# Altium PCB keeb1_V2.PcbDoc
Units mm, origin at the board's own origin, x right, y up, seen from the top; angles counter-clockwise.
Board outline 66.75 x 50.35 mm, 4 copper layers (Top Layer, INT_1, INT_2, Bottom Layer), stack 0.605 mm thick; 40 components, 40 nets, 160 pads, 39 vias.
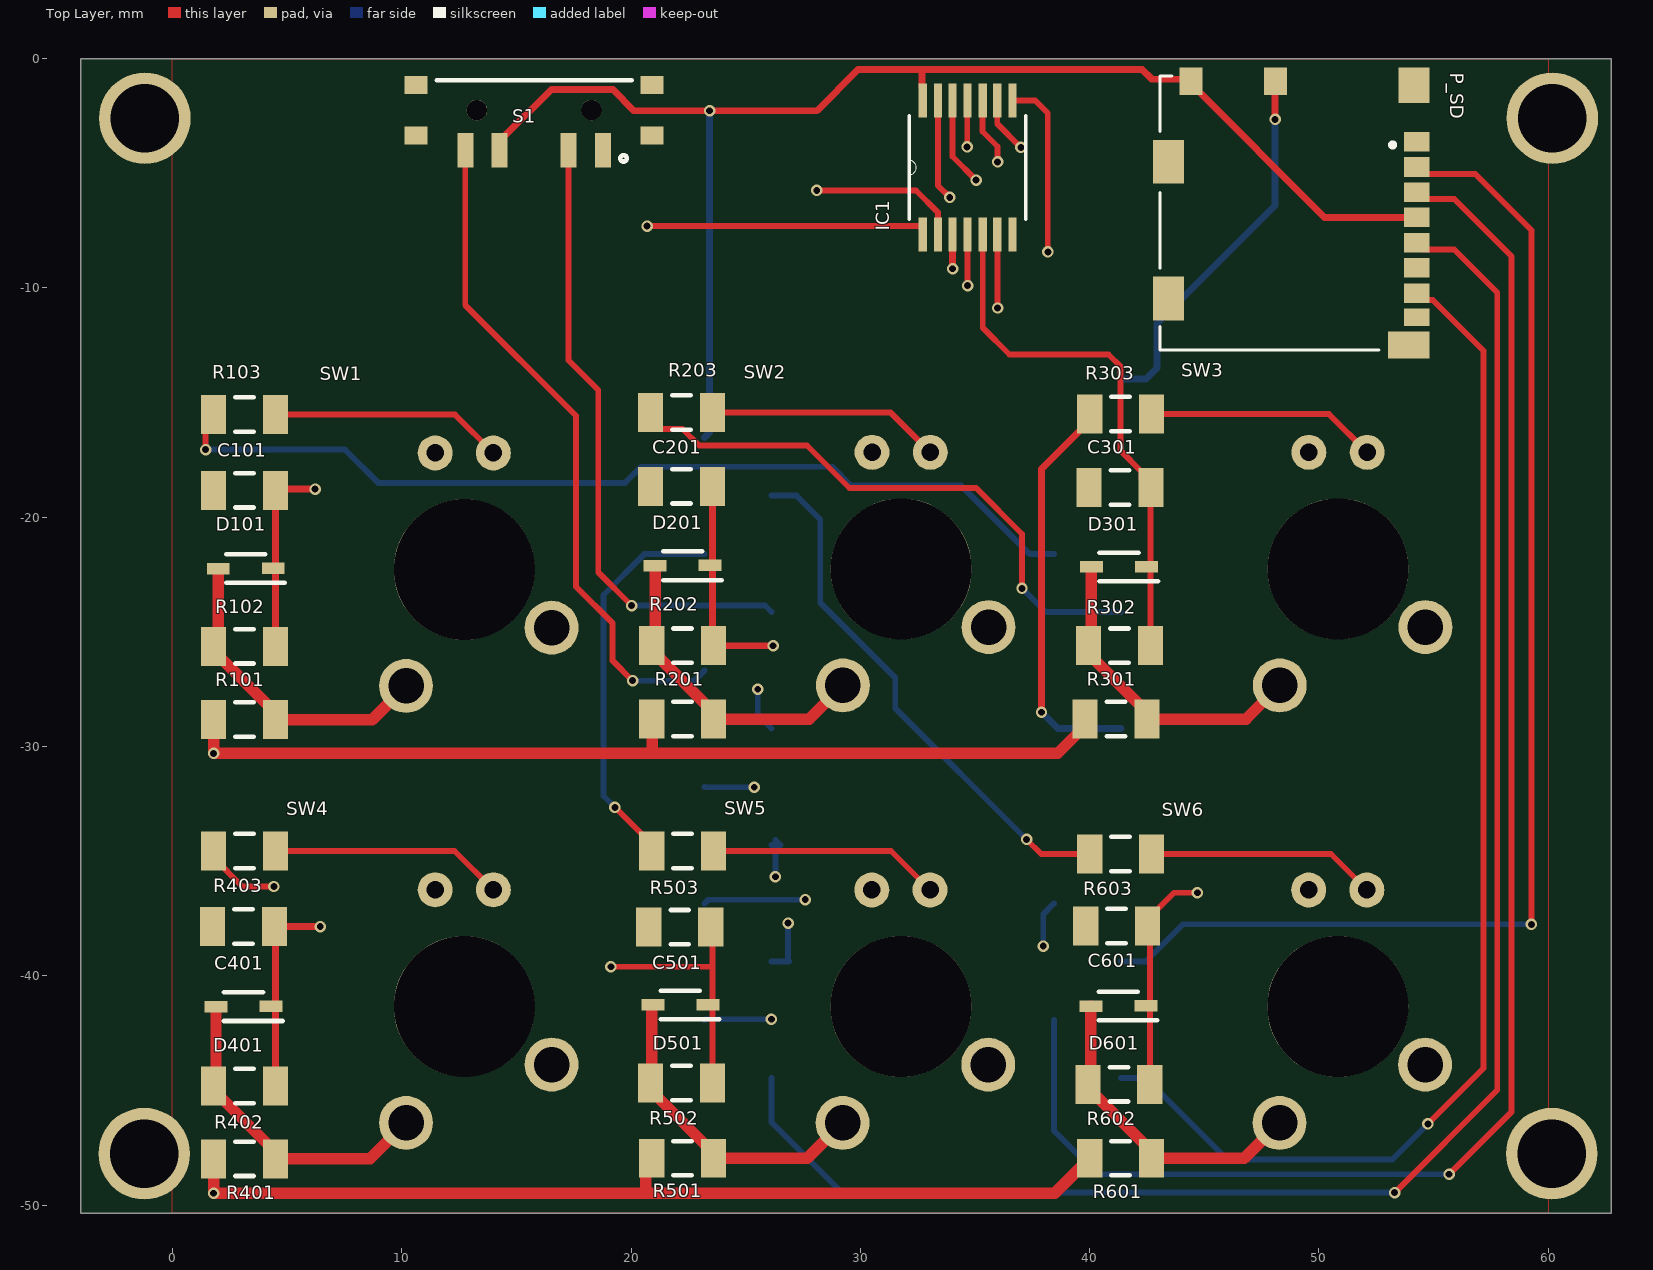
[diagram p0: Top Layer view]
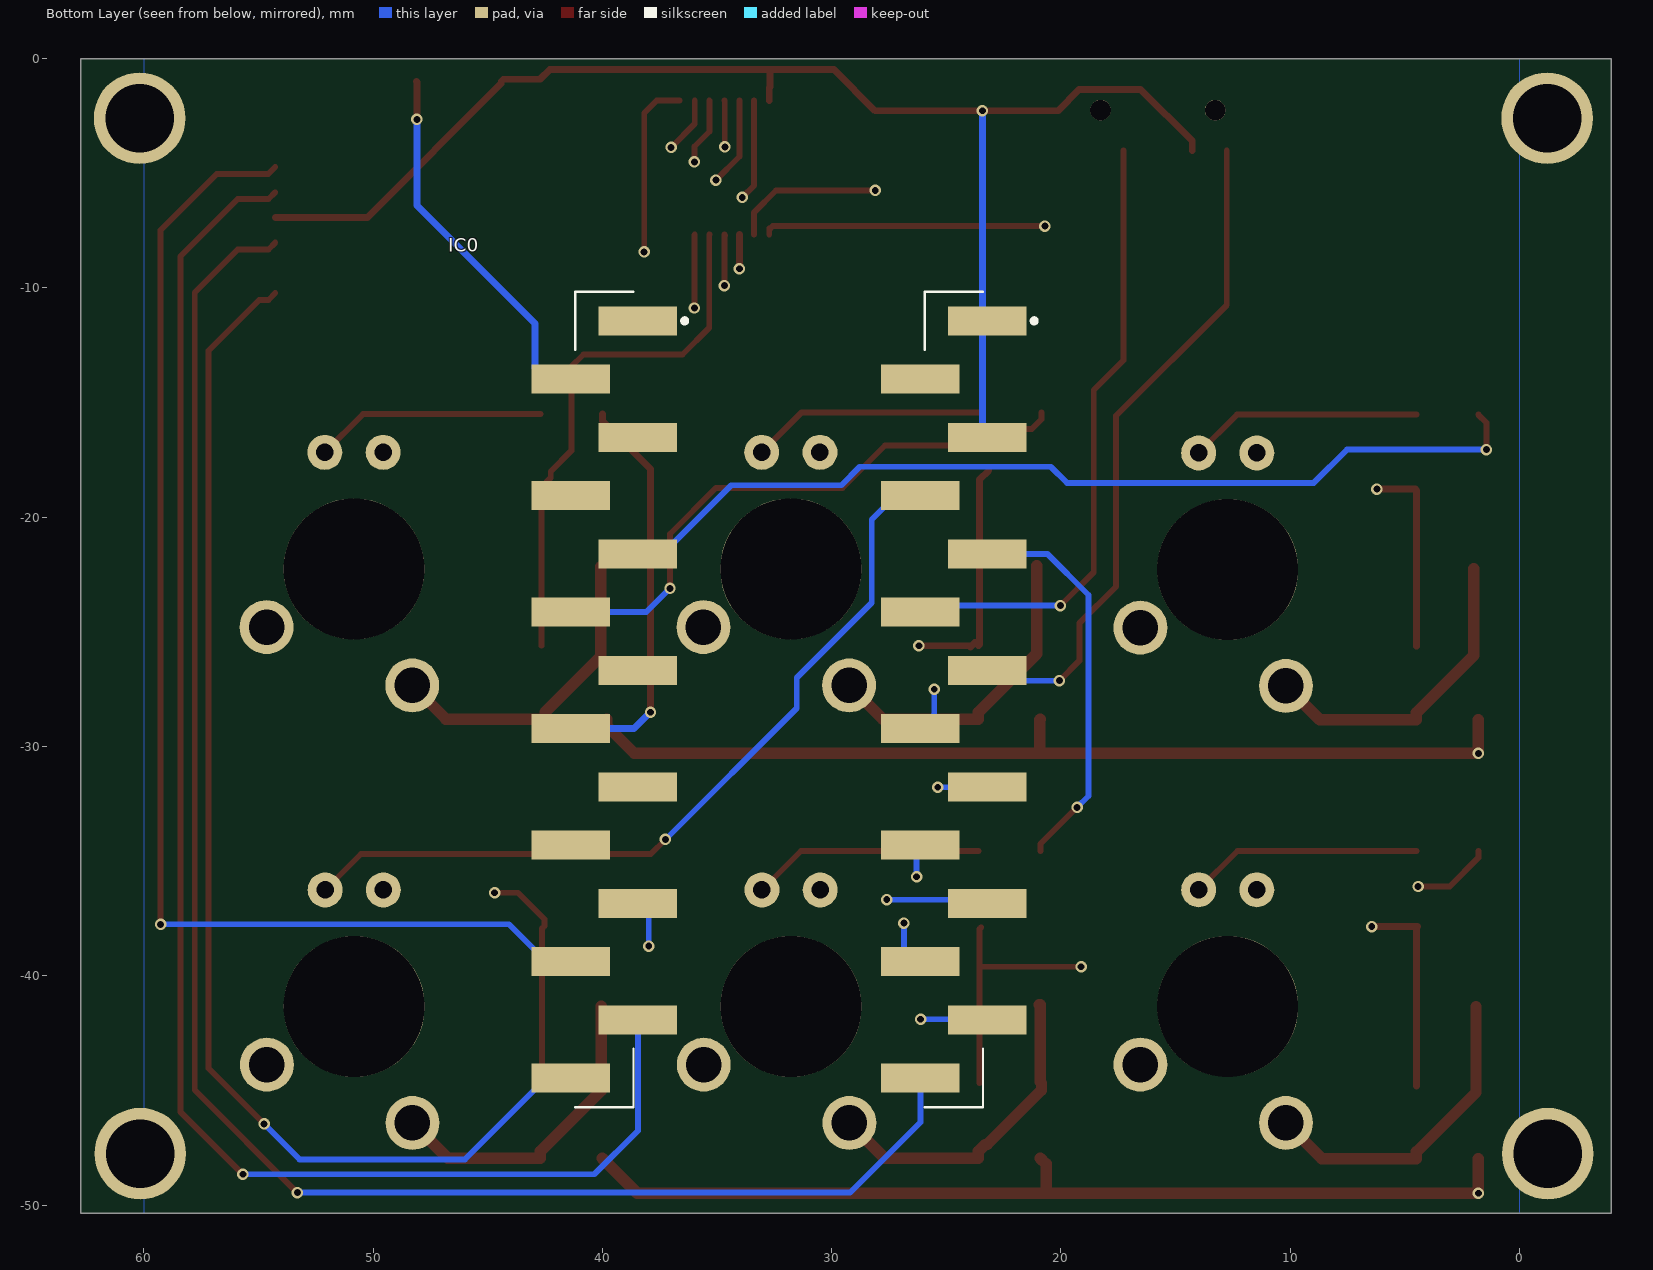
[diagram p1: Bottom Layer view, seen from below]
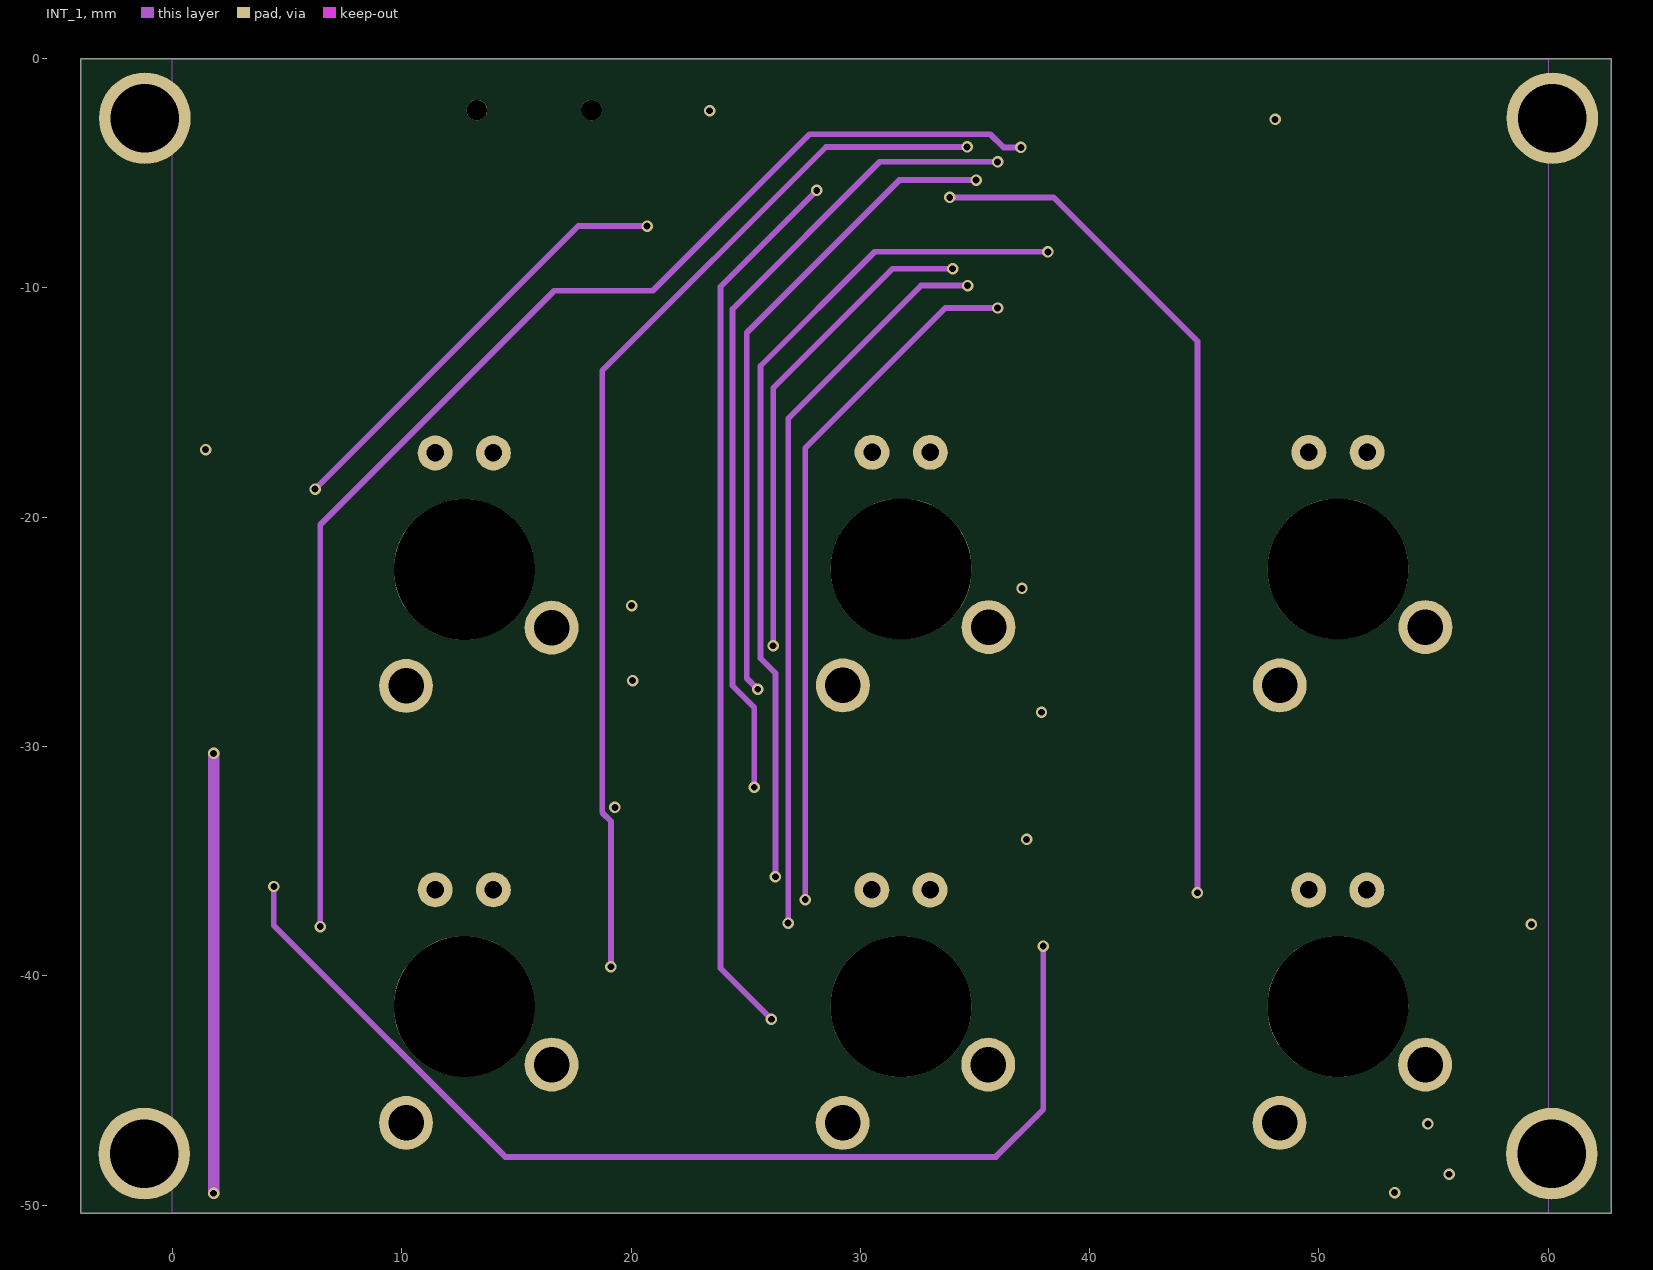
[diagram p2: INT_1]
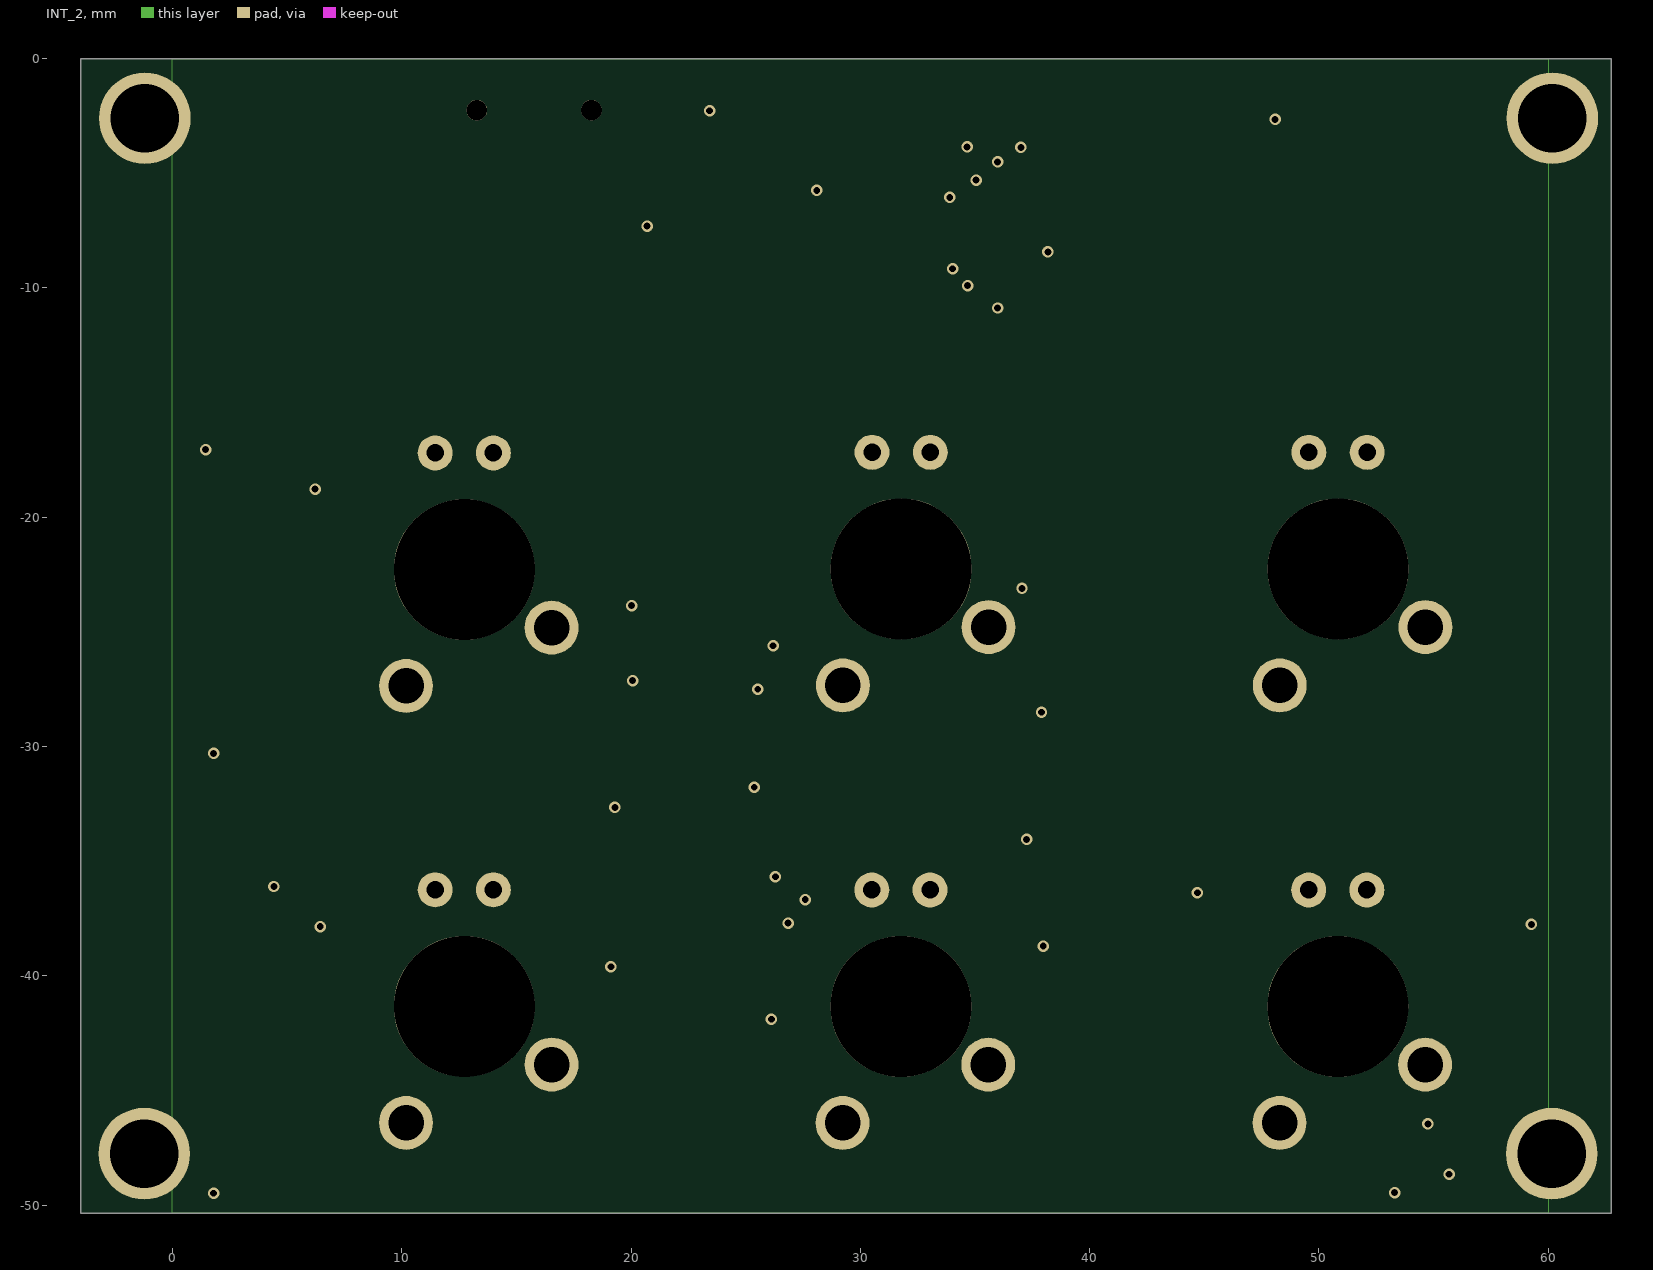
[diagram p3: INT_2]

## Layer stack, top to bottom
Top Solder: solder mask 0.0102, Solder Resist, Dk 3.5
Top Layer: signal copper 0.0356
Dielectric 2: prepreg 0.0711, PP-006, Dk 4.1
INT_1: signal copper 0.0356
Dielectric 1: dielectric 0.32, FR-4, Dk 4.8
INT_2: signal copper 0.0356
Dielectric 3: prepreg 0.0711, PP-006, Dk 4.1
Bottom Layer: signal copper 0.0356
Bottom Solder: solder mask 0.0102, Solder Resist, Dk 3.5

## Board outline
-4,-50.35 -4,0 62.75,0 62.75,-50.35

## Design rules (kind name [scope] priority, off if disabled: settings)
Clearance [All] p1: gap=0.178 ignorepadtopadclearanceinfootprint=TRUE
ComponentClearance ComponentClearance_1 [InComponent('IC0') or InComponent('P_SD')] p1: gap=0 collisioncheckmode=3 verticalgap=0 showdistances=FALSE
ComponentClearance [All] p2: gap=0.254 collisioncheckmode=3 verticalgap=0.254 showdistances=FALSE
HoleSize [All] p1: absolutevalues=TRUE maxlimit=10 minlimit=0.025 maxpercent=80.000 minpercent=20.000
MinimumSolderMaskSliver [All] p1: minsoldermaskwidth=0.032
PolygonConnect [All] p1: connectstyle=Relief reliefconductorwidth=0.254 reliefentries=4 polygonreliefangle="90 Angle" airgapwidth=0.254
RoutingVias [All] p1: holewidth=0.711 width=1.27 viastyle="Through Hole" minholewidth=0.2 minwidth=0.3 maxholewidth=2 maxwidth=5
SilkToSilkClearance [All] p1: silktosilkclearance=0.025
SilkToSolderMaskClearance [IsPad] p1: minsilkscreentomaskgap=0.025 clearancetoexposedcopper=TRUE
SolderMaskExpansion [All] p1: expansion=0.102
Width [All] p1: maxlimit=0.8 minlimit=0.254 preferedwidth=0.36
25 further rules are at their usual default settings.

## Components (designator, comment, footprint, x,y, rotation, side; value= is the part's Value field where it differs from the comment)
C101 "Cap" C1206 3.15,-18.825 r0 top value=0.68uF
C201 "Cap" C1206 22.2,-18.65 r0 top value=0.68uF
C301 "Cap" C1206 41.325,-18.7 r0 top value=0.68uF
C401 "Cap" C1206 3.1,-37.85 r0 top value=0.68uF
C501 "Cap" C1206 22.125,-37.875 r0 top value=0.68uF
C601 "Cap" C1206 41.175,-37.825 r0 top value=0.68uF
D101 "Diode" MMDL6050T1G 3.15,-22.275 r0 top
D201 "Diode" MMDL6050T1G 22.2,-22.15 r0 top
D301 "Diode" MMDL6050T1G 41.225,-22.2 r0 top
D401 "Diode" MMDL6050T1G 3.05,-41.375 r0 top
D501 "Diode" MMDL6050T1G 22.1,-41.3 r0 top
D601 "Diode" MMDL6050T1G 41.2,-41.35 r0 top
IC0 "Teensy_LC_MAIN_PINS" Teensy_LC_SMD_MAIN 38.45,-11.435 r180 bottom
IC1 "SN74AHC14Pw" TSSOP-14 34.675,-4.75 r90 top
P_SD "104031-0811" SDCARD 44.761,-12.731 r90 top
R101 "Res1" C1206 3.15,-28.825 r180 top value=10k
R102 "Res1" C1206 3.15,-25.625 r180 top value=1K
R103 "Res1" C1206 3.15,-15.525 r0 top value=750
R201 "Res1" C1206 22.25,-28.8 r180 top value=10k
R202 "Res1" C1206 22.25,-25.6 r180 top value=1K
R203 "Res1" C1206 22.2,-15.425 r0 top value=750
R301 "Res1" C1206 41.15,-28.8 r180 top value=10k
R302 "Res1" C1206 41.3,-25.6 r180 top value=1K
R303 "Res1" C1206 41.35,-15.5 r0 top value=750
R401 "Res1" C1206 3.15,-47.975 r180 top value=10k
R402 "Res1" C1206 3.15,-44.8 r180 top value=1K
R403 "Res1" C1206 3.15,-34.55 r0 top value=750
R501 "Res1" C1206 22.25,-47.95 r180 top value=10k
R502 "Res1" C1206 22.2,-44.675 r180 top value=1K
R503 "Res1" C1206 22.25,-34.55 r0 top value=750
R601 "Res1" C1206 41.35,-47.95 r180 top value=10k
R602 "Res1" C1206 41.275,-44.725 r180 top value=1K
R603 "Res1" C1206 41.35,-34.686 r0 top value=750
S1 "PCM13SMTR" PCM-13SMTR 19.673,-4.36 r180 top
SW1 "MX1A-Switch" MX1A-SWITCH 12.741,-22.245 r180 top
SW2 "MX1A-Switch" MX1A-SWITCH 31.791,-22.22 r180 top
SW3 "MX1A-Switch" MX1A-SWITCH 50.841,-22.22 r180 top
SW4 "MX1A-Switch" MX1A-SWITCH 12.741,-41.295 r180 top
SW5 "MX1A-Switch" MX1A-SWITCH 31.78,-41.3 r180 top
SW6 "MX1A-Switch" MX1A-SWITCH 50.83,-41.3 r180 top

## Footprints (in the part's own frame and the unit in brackets; to place one, negate y for a bottom-side part, rotate by r counter-clockwise, add the part's x,y. Pads: shape width x height; smd on the part's side, far side on the other; paste and mask are expansions set on the pad)
C1206 [mm] "Chip Capacitor, Body 3.2x1.6mm, IPC High Density"
  rect 1.1x1.7 smd: 1(-1.35,0) 2(1.35,0)
  silkscreen extent -0.4,-0.75 0.4,0.75, body extent -1.7,-0.9 1.7,0.9, height 1.3
MMDL6050T1G [mm]
  rect 1x0.5 smd: 1(-1.147,0.036) 2(1.25,0.05)
  silkscreen extent -0.8,-0.59 1.75,0.66
MX1A-SWITCH [mm]
  round 2.35 hole 1.55: 1(-3.799,2.57) 2(2.551,5.11)
  round 6.15 hole 6.15: 5(0.011,0.03)
  round 1.524 hole 0.762: 6(-1.259,-5.05) 7(1.281,-5.05)
  body extent -7.72,-7.85 7.88,7.75, height 15.21
PCM-13SMTR [mm] "SP3T"
  rect 0.7x1.5 smd: 1(0.898,-0.36) 2(2.398,-0.36) 3(5.398,-0.36) 4(6.898,-0.36)
  round 0.9 hole 0.9 unplated: None(1.398,-2.11) None(6.398,-2.11)
  rect 1x0.8 smd: P$1(-1.252,-1.01) P$2(-1.252,-3.21) P$3(9.048,-1.01) P$4(9.048,-3.21)
  silkscreen extent -0.35,-3.41 8.15,0.13, body extent -0.35,-3.4 8.18,-0.8, height 1.4
SDCARD [mm]
  rect 0.85x1.1 smd: 1(9.106,-9.499) 3(6.906,-9.499) 4(5.806,-9.499) 5(4.706,-9.499) 6(3.606,-9.499) 7(2.506,-9.499)
  rect 0.875x1.1 smd: 2(8.006,-9.499)
  rect 0.75x1.1 smd: 8(1.456,-9.499)
  rect 1.2x1 smd: 9(11.741,-3.349) 10(11.741,0.351)
  rect 1.55x1.35 smd: G1(11.566,-9.374)
  rect 1.17x1.8 smd: G2(0.246,-9.149)
  rect 1.9x1.35 smd: G3(2.271,1.326) G4(8.241,1.326)
  silkscreen extent 0.03,-8.55 11.98,1.7, body extent -1.45,-13.18 12.65,2.02, height 1.86
Teensy_LC_SMD_MAIN [mm]
  rect 3.43x1.27 smd: 0(-2.92,-2.54) 1(0,-5.08) 2(-2.92,-7.62) 3(0,-10.16) 3.3V(15.24,-5.08) 4(-2.92,-12.7) 5(0,-15.24) 6(-2.92,-17.78) 7(0,-20.32) 8(-2.92,-22.86) 9(0,-25.4) 10(-2.92,-27.94) 11(0,-30.48) 12(-2.92,-33.02) 13(12.32,-33.02) 14/A0(15.24,-30.48) 15/A1(12.32,-27.94) 16/A2(15.24,-25.4) 17/A3(12.32,-22.86) 18/A4(15.24,-20.32) 19/A5(12.32,-17.78) 20/A6(15.24,-15.24) 21/A7(12.32,-12.7) 22/A8(15.24,-10.16) 23/A9(12.32,-7.62) GND(0,0) GND(12.32,-2.54) VIN(15.24,0)
  silkscreen extent -2.73,-34.28 17.38,1.27, body extent -8.27,-34.29 16.4,1.27, height 10.68
TSSOP-14 [mil] "for SN74AHC14PW"
  rect 58x14 smd: 1(-115,77) 2(-115,51) 3(-115,26) 4(-115,0) 5(-115,-26) 6(-115,-51) 7(-115,-77) 8(115,-77) 9(115,-51) 10(115,-26) 11(115,0) 12(115,26) 13(115,51) 14(115,77)
  silkscreen extent -89,-100 89,100, body extent -125,-99 245,115, height 101

## Part data
C101 C201 C301 C401 C501 C601: "Capacitor", LatestRevisionDate=17-Jul-2002, LatestRevisionNote="Re-released for DXP Platform.", PackageDescription="Radial Cap, Thru-Hole; 2 Leads; 0.3 in Pin Spacing", PackageReference=RAD-0.3, Published=8-Jun-2000, Publisher="Altium Limited"
D101 D201 D301 D401 D501 D601: "Default Diode", Code_JEDEC=DO-214-AB, LatestRevisionDate=17-Jul-2002, LatestRevisionNote="Re-released for DXP Platform.", PackageDescription="DO-214-AB/SMC; 2 C-Bend Leads; Body 7.9 x 5.9 mm, inc. leads (LxW)", PackageReference=SMC, PackageVersion=Sep-1996, Published=8-Jun-2000, Publisher="Altium Limited"
IC1: "6 inverting schmitt trigger"
P_SD: library part SDcard
R101 R102 R103 R201 R202 R203 R301 R302 R303 R401 R402 R403 R501 R502 R503 R601 R602 R603: "Resistor", LatestRevisionDate=17-Jul-2002, LatestRevisionNote="Re-released for DXP Platform.", PackageDescription="Axial Device, Thru-Hole; 2 Leads; 0.3 in Pin Spacing", PackageReference=AXIAL-0.3, Published=8-Jun-2000, Publisher="Altium Limited"
S1: "SP3T Ultraminiature surface mount slide switch"

## Free pads (board coordinates)
  round 4 hole 3: 80(-1.225,-47.75) 80(-1.2,-2.6) 80(60.15,-47.75) 80(60.175,-2.6)

## Via types
v1: diameter 0.5, hole 0.3, Top Layer to Bottom Layer, tented both sides, 39 vias

## Nets (pads, with @x,y where several pads share a name; then routed paths per layer and width w, separated by ;. In a path a pad name is that pad's centre, name@x,y a point inside that pad or via, vN(x,y) a via of type N, cw(c..) or ccw(c..) an arc to the next point about the centre after c; other vN are vias at no path point)
3v3: IC0.3.3V IC0.VIN IC1.14 P_SD.4 P_SD.10 S1.3 | length 60.7
  Top Layer w0.3: S1.3 14.275,-3.6 16.525,-1.35 19.214,-1.35 20.139,-2.275 v1(23.425,-2.275) 28.1,-2.275 29.894,-0.481 32.691,-0.481 ; IC1.14 32.719,-1.27 32.691,-1.242 32.691,-0.481 ; P_SD.10@44.32,-0.9 42.71,-0.9 42.291,-0.481 32.691,-0.481 ; P_SD.10 44.41,-1.09 50.245,-6.925 P_SD.4
  Bottom Layer w0.3: IC0.3.3V 23.425,-16.3 v1(23.425,-2.275)
GND: C101.1 C201.1 C301.1 C401.1 C501.1 C601.1 IC0.GND IC1.7 P_SD.6 P_SD.G1 P_SD.G2 P_SD.G3 P_SD.G4 SW1.1 SW1.7 SW2.1 SW2.7 SW3.1 SW3.7 SW4.1 SW4.7 SW5.1 SW5.7 SW6.1 SW6.7
NetC101_2: C101.2 D101.2 IC1.1 R102.1 | length 40.1
  Top Layer w0.254: v1(20.7,-7.3) 32.569,-7.3 32.694,-7.425 32.719,-7.4 IC1.1
  Top Layer w0.3: R102.1 C101.2 4.55,-18.775 v1(6.225,-18.775)
  INT_1 w0.254: v1(6.225,-18.775) 17.7,-7.3 v1(20.7,-7.3)
NetC201_2: C201.2 D201.2 IC1.3 R202.1 | length 33.3
  Top Layer w0.3: C201.2@23.15,-17.95 23.55,-18.35 C201.2 23.55,-25.55 R202.1 23.75,-25.45 23.95,-25.65 24,-25.6 v1(26.2,-25.6) ; IC1.3 34.02,-7.676 34.02,-9.16 v1(34.025,-9.165)
  INT_1 w0.254: v1(26.2,-25.6) 26.2,-14.365 31.4,-9.165 v1(34.025,-9.165)
NetC301_2: C301.2 D301.2 IC1.5 R302.1 | length 23.5
  Top Layer w0.254: IC1.5@35.33,-7.676 IC1.5 35.335,-11.735 36.5,-12.9 40.825,-12.9 41.35,-13.425 41.35,-17.1 42.252,-18.002 42.252,-18.277 C301.2 42.65,-18.725 R302.1
NetC401_2: C401.2 D401.2 IC1.9 R402.1 | length 66.8
  Top Layer w0.254: IC1.9 35.97,-2.845 v1(37,-3.875)
  Top Layer w0.3: R402.1 4.5,-37.9 C401.2 6.4,-37.85 v1@6.425,-37.875
  INT_1 w0.254: v1(6.45,-37.85) 6.45,-20.325 16.65,-10.125 20.95,-10.125 27.78,-3.295 35.67,-3.295 36.25,-3.875 v1(37,-3.875)
NetC501_2: C501.2 D501.2 IC1.11 R502.1 | length 59.4
  Top Layer w0.254: v1@19.1,-39.675 19.175,-39.6 23.55,-39.6 ; C501.2 23.55,-37.95 23.55,-39.6 ; R502.1 23.55,-39.6 ; v1(34.653,-3.85) 34.664,-3.839 34.664,-1.84 IC1.11
  INT_1 w0.254: v1(19.125,-39.6) 19.125,-33.26 18.745,-32.88 18.745,-13.605 28.5,-3.85 v1(34.653,-3.85)
NetC601_2: C601.2 D601.2 IC1.13 R602.1 | length 51.8
  Top Layer w0.254: IC1.13 33.38,-5.53 v1(33.9,-6.05) ; R602.1 42.625,-37.925 C601.2 42.525,-37.525 43.675,-36.375 v1(44.7,-36.375)
  INT_1 w0.254: v1(33.9,-6.05) 38.425,-6.05 44.7,-12.325 v1(44.7,-36.375)
NetD101_1: D101.1 R101.1 R102.2 SW1.2 | length 13.9
  Top Layer w0.5: D101.1 2.003,-26.028 4.5,-28.525 R101.1 8.72,-28.825 SW1.2
NetD201_1: D201.1 R201.1 R202.2 SW2.2 | length 14
  Top Layer w0.5: D201.1 21.053,-25.953 23.6,-28.5 R201.1 27.77,-28.8 SW2.2
NetD301_1: D301.1 R301.1 R302.2 SW3.2 | length 14
  Top Layer w0.5: D301.1 40.078,-26.078 42.5,-28.5 R301.1 46.82,-28.8 SW3.2
NetD401_1: D401.1 R401.1 R402.2 SW4.2 | length 14.1
  Top Layer w0.5: D401.1 1.903,-45.078 4.5,-47.675 R401.1 8.62,-47.975 SW4.2
NetD501_1: D501.1 R501.1 R502.2 SW5.2 | length 14.2
  Top Layer w0.5: D501.1 20.901,-41.264 20.901,-44.624 R502.2 20.85,-44.975 23.225,-47.35 23.3,-47.35 23.6,-47.65 R501.1 27.689,-47.95 SW5.2
NetD601_1: D601.1 R601.1 R602.2 SW6.2 | length 13.9
  Top Layer w0.5: D601.1 40.053,-45.003 42.7,-47.65 R601.1 46.739,-47.95 SW6.2
NetIC0_3: IC0.3 R103.1 | length 41.1
  Top Layer w0.254: v1(1.45,-17.05) 1.45,-15.875 R103.1
  Bottom Layer w0.254: v1(1.45,-17.05) 7.525,-17.05 8.975,-18.5 19.742,-18.5 20.442,-17.8 28.774,-17.8 29.574,-18.6 34.375,-18.6 37.37,-21.595 IC0.3
NetIC0_4: IC0.4 R203.1 | length 25.7
  Top Layer w0.254: R203.1 20.85,-15.725 21.273,-16.148 22.248,-16.148 22.975,-16.875 27.675,-16.875 29.525,-18.725 35.05,-18.725 37.05,-20.725 v1(37.05,-23.1)
  Bottom Layer w0.254: v1(37.05,-23.1) 38.085,-24.135 IC0.4
NetIC0_6: IC0.6 R303.1 | length 17.6
  Top Layer w0.3: v1(37.9,-28.5) 37.9,-17.9 40,-15.8 R303.1
  Bottom Layer w0.3: v1(37.9,-28.5) 38.615,-29.215 IC0.6
NetIC0_9: IC0.9 R403.1 | length 52.9
  Top Layer w0.254: R403.1 1.8,-34.85 3.05,-36.1 v1(4.425,-36.1)
  INT_1 w0.254: v1(4.425,-36.1) 4.425,-37.8 14.515,-47.89 35.91,-47.89 37.975,-45.825 v1(37.975,-38.7)
  Bottom Layer w0.254: v1(37.975,-38.7) 37.975,-37.31 IC0.9
NetIC0_10: IC0.10 P_SD.2 | length 55
  Top Layer w0.254: P_SD.2 54.571,-5.035 56.817,-5.035 59.263,-7.481 v1(59.263,-37.75)
  Bottom Layer w0.254: IC0.10 42.45,-39.375 44.075,-37.75 v1(59.263,-37.75)
NetIC0_11: IC0.11 P_SD.3 | length 69.3
  Top Layer w0.254: P_SD.3 54.558,-6.123 55.898,-6.123 58.4,-8.625 58.4,-42.1 58.4,-45.925 v1(55.675,-48.65)
  Bottom Layer w0.254: IC0.11 38.45,-46.75 40.35,-48.65 v1(55.675,-48.65)
NetIC0_12: IC0.12 P_SD.7 | length 54.2
  Top Layer w0.254: P_SD.7 54.558,-10.523 54.958,-10.523 57.175,-12.74 57.175,-13.3 57.175,-43.175 57.175,-44.025 v1(54.75,-46.45)
  Bottom Layer w0.254: IC0.12 42.45,-44.455 45.995,-48 53.2,-48 v1(54.75,-46.45)
NetIC0_13: IC0.13 P_SD.5 | length 75.9
  Top Layer w0.254: v1(53.3,-49.45) 57.775,-44.975 57.775,-42.9 57.775,-11.75 57.775,-10.2 55.898,-8.323 54.558,-8.323 P_SD.5
  Bottom Layer w0.254: IC0.13 26.13,-46.38 29.2,-49.45 v1(53.3,-49.45)
NetIC0_14/A0: IC0.14/A0 IC1.2 | length 48.4
  Top Layer w0.254: v1(28.1,-5.75) 32.425,-5.75 33.38,-6.705 IC1.2
  INT_1 w0.254: v1(26.125,-41.889) 23.9,-39.664 23.9,-9.95 v1(28.1,-5.75)
  Bottom Layer w0.254: IC0.14/A0 23.236,-41.889 v1(26.125,-41.889)
NetIC0_15/A1: IC0.15/A1 IC1.4 | length 36.9
  Top Layer w0.254: v1(34.675,-9.9) 34.675,-7.746 34.638,-7.708 IC1.4
  INT_1 w0.254: v1(26.85,-37.7) 26.855,-37.695 26.855,-15.695 32.65,-9.9 v1(34.675,-9.9)
  Bottom Layer w0.254: IC0.15/A1 26.892,-39.375 26.85,-39.333 v1(26.85,-37.7)
NetIC0_16/A2: IC0.16/A2 IC1.6 | length 38.3
  Top Layer w0.254: IC1.6 35.985,-7.686 v1(35.985,-10.875)
  INT_1 w0.254: v1(27.6,-36.675) 27.6,-16.975 33.7,-10.875 v1(35.985,-10.875)
  Bottom Layer w0.254: IC0.16/A2 23.37,-36.675 v1(27.6,-36.675)
NetIC0_17/A3: IC0.17/A3 IC1.8 | length 47.2
  Top Layer w0.254: IC1.8 37.629,-1.829 38.175,-2.375 v1(38.175,-8.425)
  INT_1 w0.254: v1(26.3,-35.675) 26.3,-26.8 25.645,-26.145 25.645,-13.405 30.625,-8.425 v1(38.175,-8.425)
  Bottom Layer w0.254: IC0.17/A3 IC0.17/A3@26.3,-34.295 ; v1(26.3,-35.675) IC0.17/A3@26.3,-34.295 ; IC0.17/A3@26.3,-34.295 26.3,-34.078 26.517,-34.295 IC0.17/A3@26.3,-34.295
NetIC0_18/A4: IC0.18/A4 IC1.10 | length 40.6
  Top Layer w0.254: IC1.10 35.325,-1.839 35.325,-3.175 35.985,-3.835 v1(35.985,-4.5)
  INT_1 w0.254: v1(25.375,-31.775) 25.375,-28.3 24.425,-27.35 24.425,-10.925 30.85,-4.5 v1(35.985,-4.5)
  Bottom Layer w0.254: IC0.18/A4 23.23,-31.775 v1(25.375,-31.775)
NetIC0_19/A5: IC0.19/A5 IC1.12 | length 34.4
  Top Layer w0.254: IC1.12 34.015,-4.265 v1(35.05,-5.3)
  INT_1 w0.254: v1(25.525,-27.5) 25.05,-27.025 25.05,-11.95 31.7,-5.3 v1(35.05,-5.3)
  Bottom Layer w0.254: v1(25.525,-27.5) 25.525,-28.61 IC0.19/A5
NetIC0_22/A8: IC0.22/A8 R503.1 | length 17.2
  Top Layer w0.254: v1(19.3,-32.65) 20.9,-34.25 R503.1
  Bottom Layer w0.254: v1(19.3,-32.65) 18.8,-32.15 18.8,-23.389 20.594,-21.595 IC0.22/A8
NetIC0_23/A9: IC0.23/A9 R603.1 | length 23.3
  Top Layer w0.254: v1@37.225,-34.05 v1(37.25,-34.05) 37.886,-34.686 R603.1
  Bottom Layer w0.254: IC0.23/A9 27.21,-19.055 28.25,-20.095 28.25,-23.725 31.525,-27 31.525,-28.325 v1(37.25,-34.05)
NetR103_2: R103.2 SW1.6 | length 10.2
  Top Layer w0.254: R103.2 12.33,-15.525 SW1.6
NetR203_2: R203.2 SW2.6 | length 10.2
  Top Layer w0.254: R203.2 31.305,-15.425 SW2.6
NetR303_2: R303.2 SW3.6 | length 10.1
  Top Layer w0.254: R303.2 50.43,-15.5 SW3.6
NetR403_2: R403.2 SW4.6 | length 10.2
  Top Layer w0.254: R403.2 12.305,-34.55 SW4.6
NetR503_2: R503.2 SW5.6 | length 10.1
  Top Layer w0.254: R503.2 31.339,-34.55 SW5.6
NetR603_2: R603.2 SW6.6 | length 10
  Top Layer w0.254: R603.2 50.525,-34.686 SW6.6
S_1in: IC0.20/A6 S1.4 | length 29.5
  Top Layer w0.254: S1.4 12.775,-10.75 17.6,-15.575 17.6,-23.025 19.2,-24.625 19.2,-26.256 v1(20.069,-27.125)
  Bottom Layer w0.254: v1(20.069,-27.125) 22.76,-27.125 IC0.20/A6
S_2in: IC0.21/A7 S1.2 | length 27.2
  Top Layer w0.254: S1.2 17.275,-13.15 18.575,-14.45 18.575,-22.4 v1(20.025,-23.85)
  Bottom Layer w0.254: v1(20.025,-23.85) 25.845,-23.85 IC0.21/A7
SD_Detect: IC0.0 P_SD.9 | length 16.4
  Top Layer w0.3: v1(48.085,-2.65) 48.085,-1.015 P_SD.9
  Bottom Layer w0.3: IC0.0 42.45,-13.975 42.935,-13.49 42.935,-11.55 48.085,-6.4 v1(48.085,-2.65)
VCC: R101.2 R201.2 R301.2 R401.2 R501.2 R601.2 | length 102.9
  Top Layer w0.5: R401.2@1.8,-47.975 v1(1.8,-49.475) 20.65,-49.475 ; R101.2 v1(1.8,-30.3) 20.925,-30.3 ; R501.2 20.65,-48.2 20.65,-49.475 ; R201.2 20.925,-28.825 20.925,-30.3 ; R301.2 39.8,-29.1 38.6,-30.3 20.925,-30.3 ; R601.2 38.475,-49.475 20.65,-49.475
  INT_1 w0.5: v1(1.8,-49.475) v1(1.8,-30.3)
pads on no net: IC0.1 IC0.2 IC0.5 IC0.7 IC0.8 P_SD.1 P_SD.8 S1.1 S1.None S1.P$1 S1.P$2 S1.P$3 S1.P$4 SW1.5 SW2.5 SW3.5 SW4.5 SW5.5 SW6.5

## Polygon pours and split planes (outlines as drawn)
GND on Top Layer "Top Layer-GND" (solid, remove dead copper, shelved, pour order 0): 0,0 60,0 60,-50.35 0,-50.35
GND on Bottom Layer "Bottom Layer-GND" (solid, remove dead copper, shelved, pour order 2): 0,0 60,0 60,-50.35 0,-50.35
GND on INT_1 "INT_1_GND" (solid, remove dead copper, shelved, pour order 4): 0,0 60,0 60,-50.35 0,-50.35
GND on INT_2 "INT_2_GND" (solid, remove dead copper, shelved, pour order 6): 0,0 60,0 60,-50.35 0,-50.35

## Other copper
Top Layer:
  pour cut-out: 32.35,-1.39
  pour cut-out: 32.35,-1.39
  pour cut-out: 32.025,-1.39